# EAGLE board openmv-sdr (EAGLE 6.1)
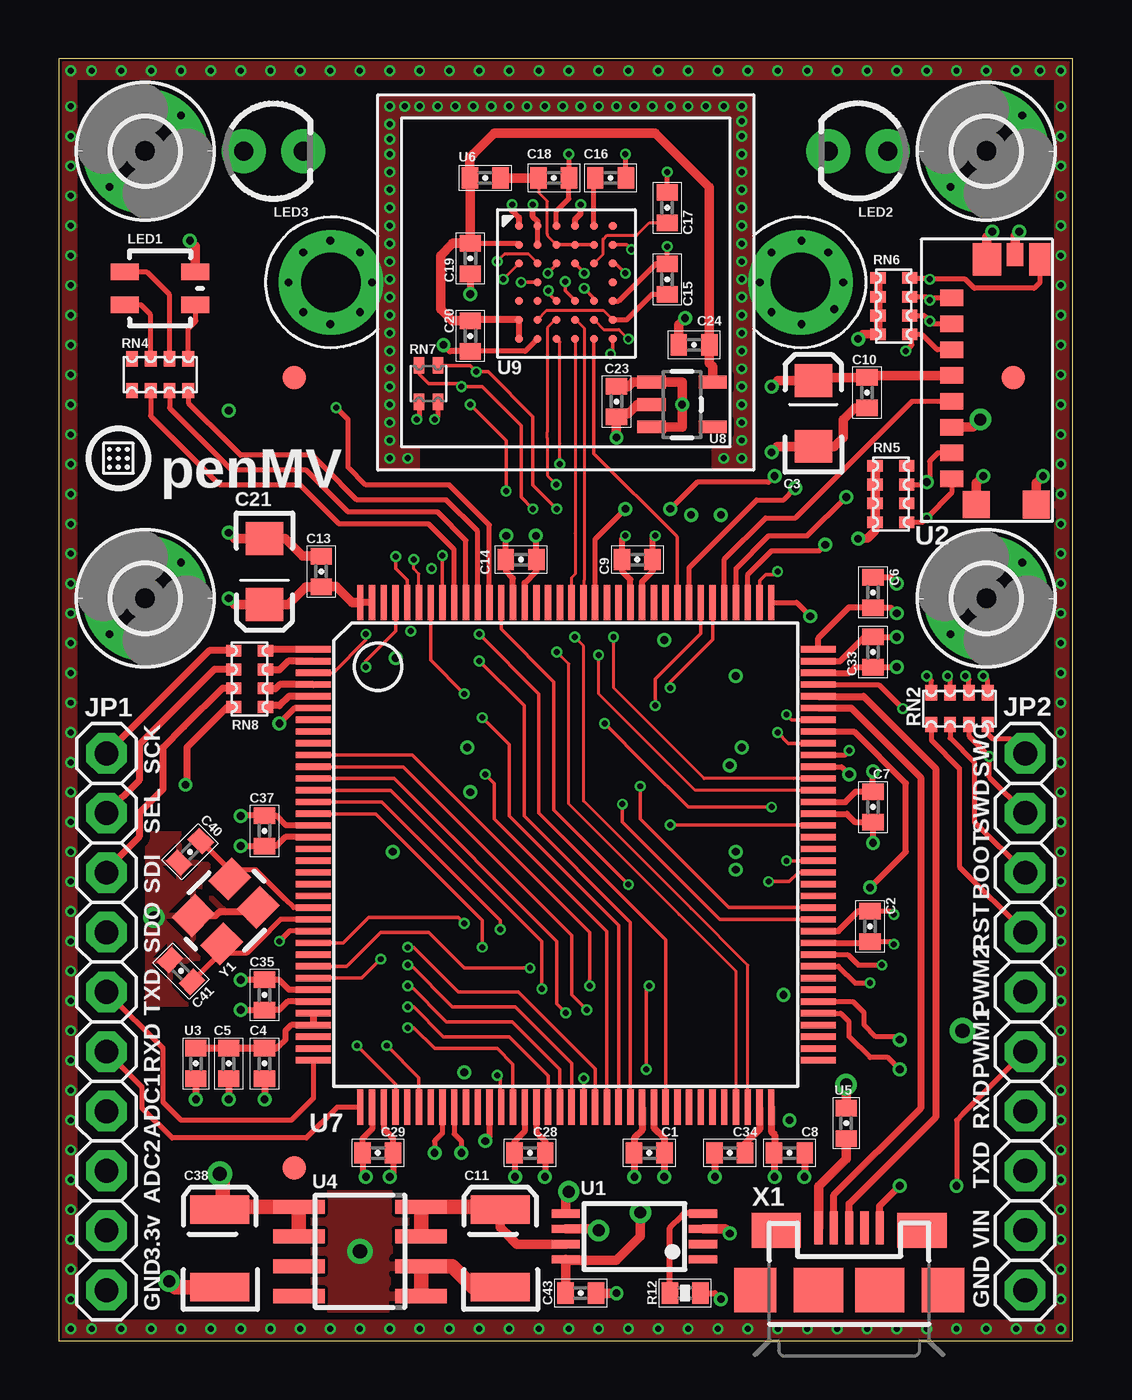
[diagram p0: board, top side]
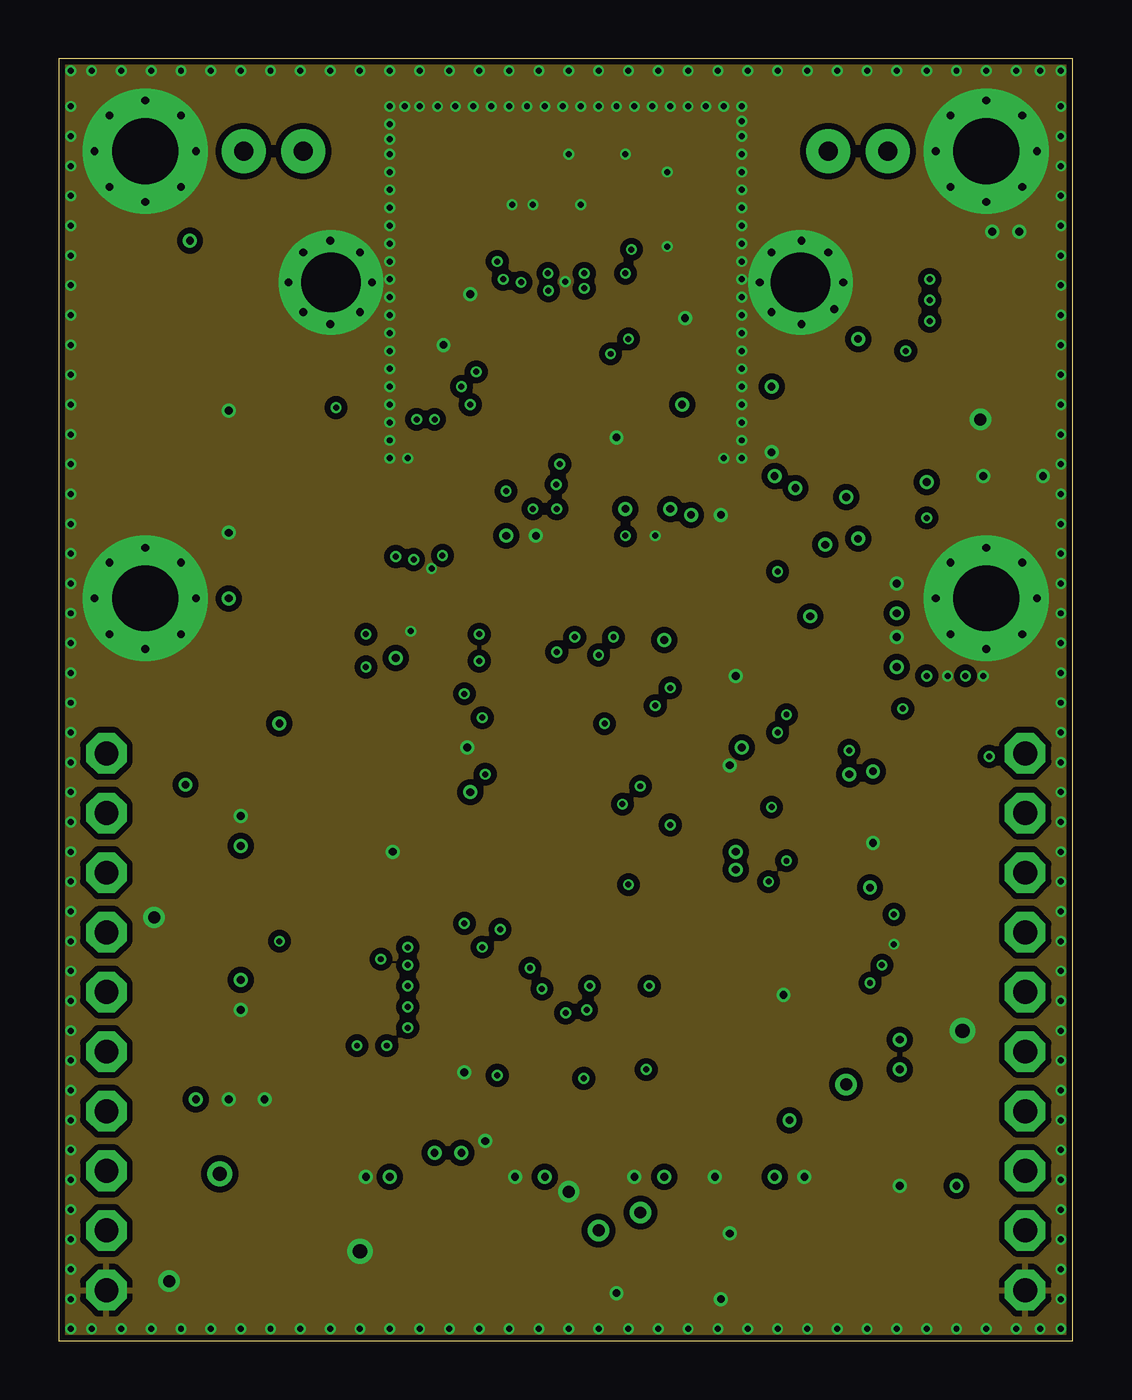
[diagram p1: board, inner layer GND]
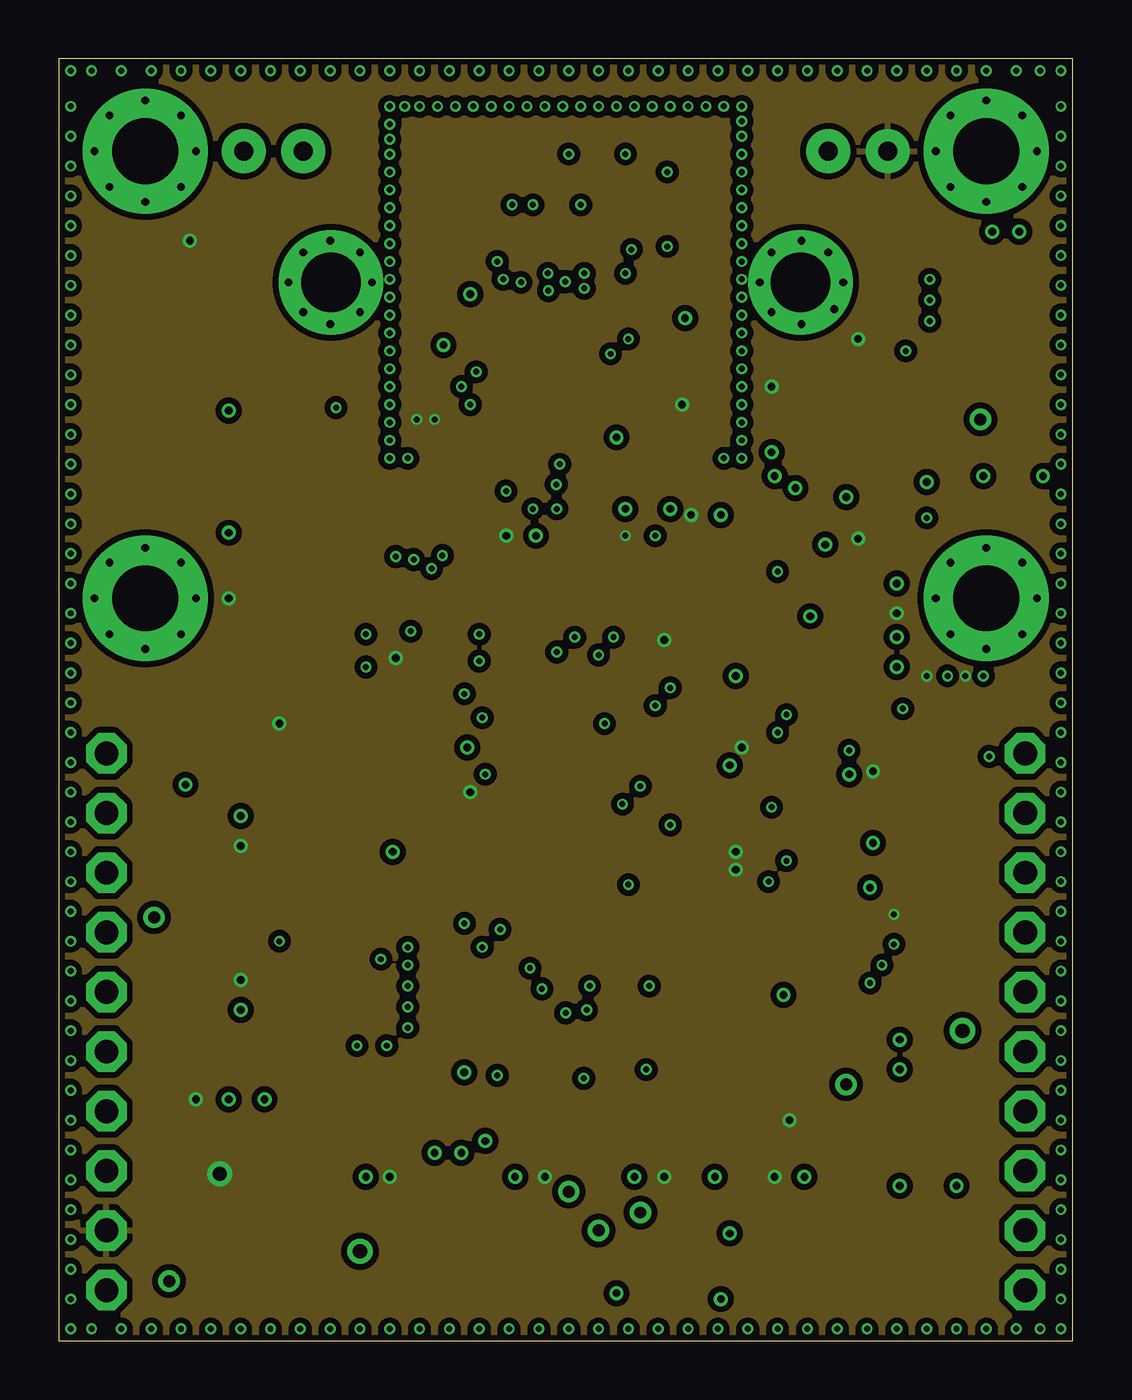
[diagram p2: board, inner layer VCC]
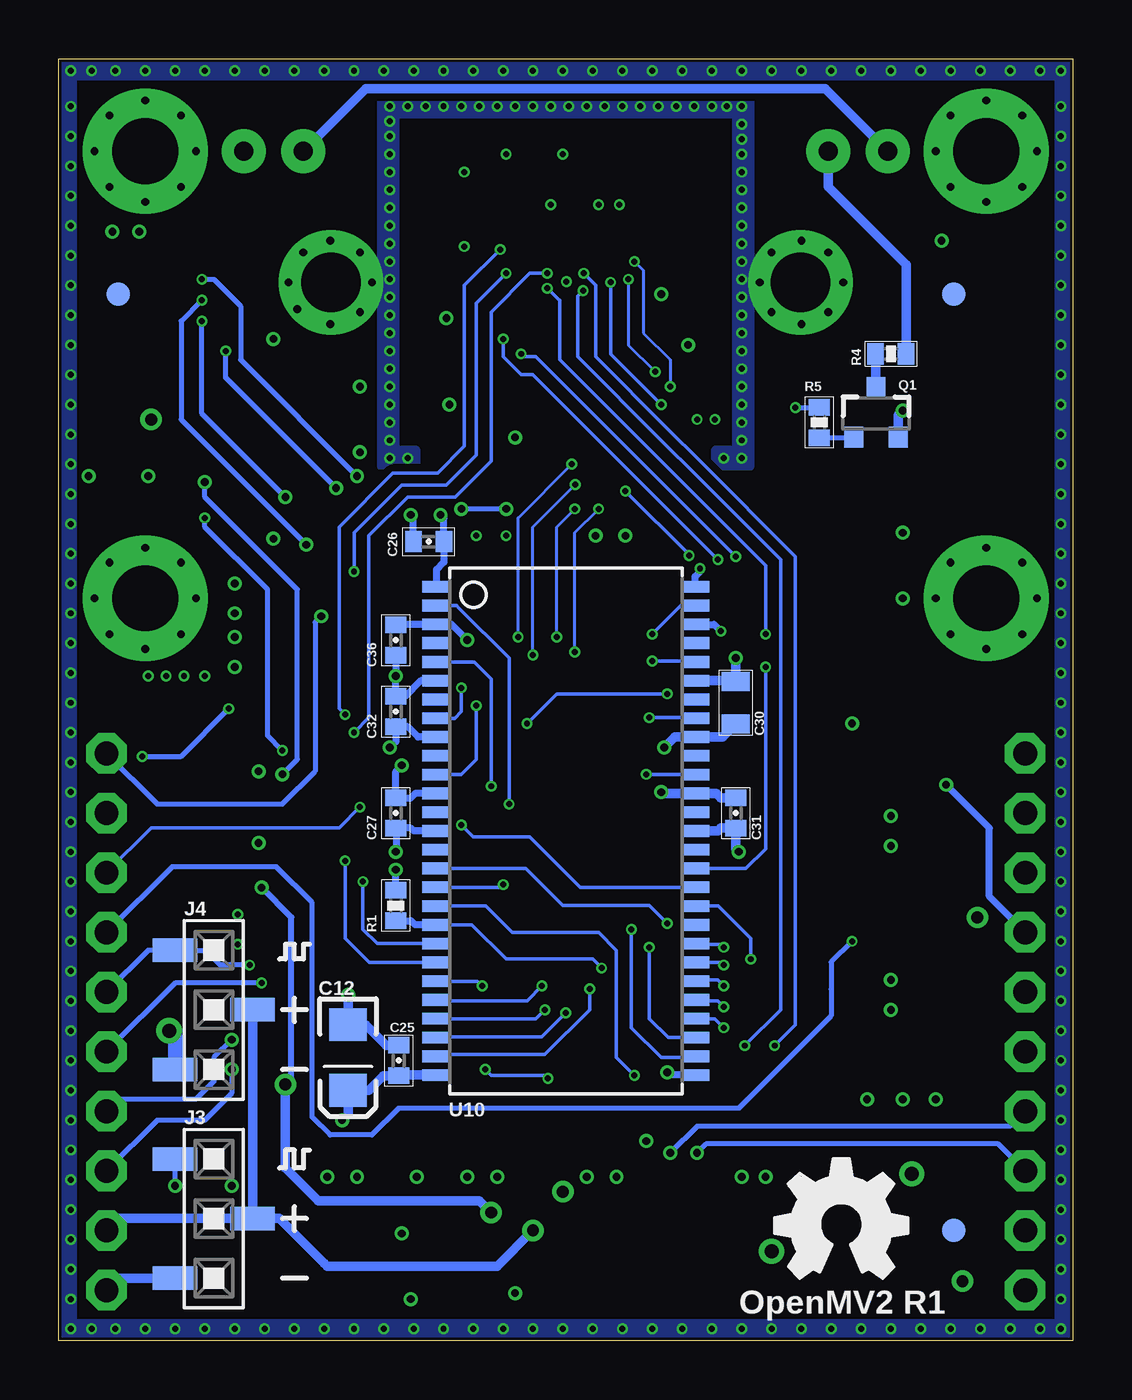
[diagram p3: board, bottom side, seen from below]

Size 43.18 x 54.61 mm. Coordinates in mm from the lower left corner, seen from the top.
Outline: 0,54.61 0,0 43.18,0 43.18,54.61 0,54.61
Copper layers (1*2+15*16): Top 0.035mm / dielectric 1.5mm / GND 0.035mm / dielectric 0.15mm / VCC 0.035mm / dielectric 0.2mm / Bottom 0.035mm
Design rules: minimum track width 5mil, minimum drill 10mil, track to track 6mil, track to pad 6mil, pad to pad 6mil, via to via 6mil, smd to smd 6mil, copper to edge 5mil, drill to drill 10mil, minimum pad ring 10mil, minimum via ring 4mil, stop-mask expansion 2mil, vias tented up to drill 30mil, thermal gap 10mil

## Footprints (pad centres in the part's own frame; a part is rotated, then mirrored left to right if it is on the bottom)
0402-CAP = smd 0.7 x 0.9: 1 -0.65,0; 2 0.65,0
EIA3216 = smd 1.4 x 1.6: A 1.4,0; C -1.4,0
EIA3528 = smd 1.2 x 2.5: A 1.65,0; C -1.65,0
0805 = smd 0.8 x 1.2: 1 -0.9,0; 2 0.9,0
2,8-PAD = drill 2.8 pad 5.334: B2,8 0,0
M1X3_SMD = smd 1 x 1.9: 1 -2.54,1.65; 2 0,-1.65; 3 2.54,1.65
1X10 = drill 1.016 octagon: 1 -11.43,0; 2 -8.89,0; 3 -6.35,0; 4 -3.81,0; 5 -1.27,0; 6 1.27,0; 7 3.81,0; 8 6.35,0; 9 8.89,0; 10 11.43,0
LED-TRICOLOR-SMD = smd 0.7 x 1.2: A 0.7,-1.5; B 0.7,1.5; G -0.7,1.5; R -0.7,-1.5
LED3MM = drill 0.813 pad 1.88: A -1.27,0; K 1.27,0
SOT23-3 = smd 0.8 x 0.9: 1 -0.95,-1; 2 0.95,-1; 3 0,1.1
0402-RES = smd 0.7 x 0.9: 1 -0.65,0; 2 0.65,0
CAT16 = smd 0.5 x 0.65: 1 -1.2,-0.675; 2 -0.4,-0.675; 3 0.4,-0.675; 4 1.2,-0.675; 5 1.2,0.675; 6 0.4,0.675; 7 -0.4,0.675; 8 -1.2,0.675
EXBV4V = smd 0.45 x 0.7: 1 -0.4,-0.775; 2 0.4,-0.775; 3 0.4,0.775; 4 -0.4,0.775
TSSOP8 = smd 1.2 x 0.35: 1 -2.925,0.975; 2 -2.925,0.325; 3 -2.925,-0.325; 4 -2.925,-0.975; 5 2.925,-0.975; 6 2.925,-0.325; 7 2.925,0.325; 8 2.925,0.975
USD-47571 = smd 1.15 x 1.15: G$1 -4.9,0.55 | smd 1.2 x 1.15: G$2 -4.9,-2 | smd 1.4 x 1.2: G$3 5.55,0.1 | smd 1 x 0.7: G$4 5.75,-1.1 | smd 1.4 x 0.9: G$5 5.55,-2.15 | smd 0.7 x 1: P$1 3.9,1.6; P$2 2.8,1.6; P$3 1.7,1.6; P$4 0.6,1.6; P$5 -0.5,1.6; P$6 -1.6,1.6; P$7 -2.7,1.6; P$8 -3.8,1.6
SOIC8 = smd 0.6 x 2.2: 1 -1.905,-2.6; 2 -0.635,-2.6; 3 0.635,-2.6; 4 1.905,-2.6; 5 1.905,2.6; 6 0.635,2.6; 7 -0.635,2.6; 8 -1.905,2.6
LQFP144 = smd 0.27 x 1.5: 1 -8.75,-10.75; 2 -8.25,-10.75; 3 -7.75,-10.75; 4 -7.25,-10.75; 5 -6.75,-10.75; 6 -6.25,-10.75; 7 -5.75,-10.75; 8 -5.25,-10.75; 9 -4.75,-10.75; 10 -4.25,-10.75; 11 -3.75,-10.75; 12 -3.25,-10.75; 13 -2.75,-10.75; 14 -2.25,-10.75; 15 -1.75,-10.75; 16 -1.25,-10.75; 17 -0.75,-10.75; 18 -0.25,-10.75; 19 0.25,-10.75; 20 0.75,-10.75; 21 1.25,-10.75; 22 1.75,-10.75; 23 2.25,-10.75; 24 2.75,-10.75; 25 3.25,-10.75; 26 3.75,-10.75; 27 4.25,-10.75; 28 4.75,-10.75; 29 5.25,-10.75; 30 5.75,-10.75; 31 6.25,-10.75; 32 6.75,-10.75; 33 7.25,-10.75; 34 7.75,-10.75; 35 8.25,-10.75; 36 8.75,-10.75; 73 8.75,10.75; 74 8.25,10.75; 75 7.75,10.75; 76 7.25,10.75; 77 6.75,10.75; 78 6.25,10.75; 79 5.75,10.75; 80 5.25,10.75; 81 4.75,10.75; 82 4.25,10.75; 83 3.75,10.75; 84 3.25,10.75; 85 2.75,10.75; 86 2.25,10.75; 87 1.75,10.75; 88 1.25,10.75; 89 0.75,10.75; 90 0.25,10.75; 91 -0.25,10.75; 92 -0.75,10.75; 93 -1.25,10.75; 94 -1.75,10.75; 95 -2.25,10.75; 96 -2.75,10.75; 97 -3.25,10.75; 98 -3.75,10.75; 99 -4.25,10.75; 100 -4.75,10.75; 101 -5.25,10.75; 102 -5.75,10.75; 103 -6.25,10.75; 104 -6.75,10.75; 105 -7.25,10.75; 106 -7.75,10.75; 107 -8.25,10.75; 108 -8.75,10.75 | smd 1.5 x 0.27: 37 10.75,-8.75; 38 10.75,-8.25; 39 10.75,-7.75; 40 10.75,-7.25; 41 10.75,-6.75; 42 10.75,-6.25; 43 10.75,-5.75; 44 10.75,-5.25; 45 10.75,-4.75; 46 10.75,-4.25; 47 10.75,-3.75; 48 10.75,-3.25; 49 10.75,-2.75; 50 10.75,-2.25; 51 10.75,-1.75; 52 10.75,-1.25; 53 10.75,-0.75; 54 10.75,-0.25; 55 10.75,0.25; 56 10.75,0.75; 57 10.75,1.25; 58 10.75,1.75; 59 10.75,2.25; 60 10.75,2.75; 61 10.75,3.25; 62 10.75,3.75; 63 10.75,4.25; 64 10.75,4.75; 65 10.75,5.25; 66 10.75,5.75; 67 10.75,6.25; 68 10.75,6.75; 69 10.75,7.25; 70 10.75,7.75; 71 10.75,8.25; 72 10.75,8.75; 109 -10.75,8.75; 110 -10.75,8.25; 111 -10.75,7.75; 112 -10.75,7.25; 113 -10.75,6.75; 114 -10.75,6.25; 115 -10.75,5.75; 116 -10.75,5.25; 117 -10.75,4.75; 118 -10.75,4.25; 119 -10.75,3.75; 120 -10.75,3.25; 121 -10.75,2.75; 122 -10.75,2.25; 123 -10.75,1.75; 124 -10.75,1.25; 125 -10.75,0.75; 126 -10.75,0.25; 127 -10.75,-0.25; 128 -10.75,-0.75; 129 -10.75,-1.25; 130 -10.75,-1.75; 131 -10.75,-2.25; 132 -10.75,-2.75; 133 -10.75,-3.25; 134 -10.75,-3.75; 135 -10.75,-4.25; 136 -10.75,-4.75; 137 -10.75,-5.25; 138 -10.75,-5.75; 139 -10.75,-6.25; 140 -10.75,-6.75; 141 -10.75,-7.25; 142 -10.75,-7.75; 143 -10.75,-8.25; 144 -10.75,-8.75
SOT23-5 = smd 0.55 x 1.2: 1 -0.95,-1.3; 2 0,-1.3; 3 0.95,-1.3; 4 0.95,1.3; 5 -0.95,1.3
CSP2 = smd 0.34 x 0.34: A1 -2,2.4; A2 -1.2,2.4; A3 -0.4,2.4; A4 0.4,2.4; A5 1.2,2.4; A6 2,2.4; B1 -2,1.6; B2 -1.2,1.6; B3 -0.4,1.6; B4 0.4,1.6; B5 1.2,1.6; B6 2,1.6; C1 -2,0.8; C2 -1.2,0.8; C3 -0.4,0.8; C4 0.4,0.8; C5 1.2,0.8; C6 2,0.8; D2 -1.2,0; D6 2,0; E1 -2,-0.8; E2 -1.2,-0.8; E3 -0.4,-0.8; E4 0.4,-0.8; E5 1.2,-0.8; E6 2,-0.8; F1 -2,-1.6; F2 -1.2,-1.6; F3 -0.4,-1.6; F4 0.4,-1.6; F5 1.2,-1.6; F6 2,-1.6; G1 -2,-2.4; G2 -1.2,-2.4; G3 -0.4,-2.4; G4 0.4,-2.4; G5 1.2,-2.4; G6 2,-2.4
TSOPII-54 = smd 0.5 x 1.2: 1 -10.4,-5.502; 2 -9.6,-5.502; 3 -8.8,-5.502; 4 -8,-5.502; 5 -7.2,-5.502; 6 -6.4,-5.502; 7 -5.6,-5.502; 8 -4.8,-5.502; 9 -4,-5.502; 10 -3.2,-5.502; 11 -2.4,-5.502; 12 -1.6,-5.502; 13 -0.8,-5.502; 14 0,-5.502; 15 0.8,-5.502; 16 1.6,-5.502; 17 2.4,-5.502; 18 3.2,-5.502; 19 4,-5.502; 20 4.8,-5.502; 21 5.6,-5.502; 22 6.4,-5.502; 23 7.2,-5.502; 24 8,-5.502; 25 8.8,-5.502; 26 9.6,-5.502; 27 10.4,-5.502; 28 10.4,5.502; 29 9.6,5.502; 30 8.8,5.502; 31 8,5.502; 32 7.2,5.502; 33 6.4,5.502; 34 5.6,5.502; 35 4.8,5.502; 36 4,5.502; 37 3.2,5.502; 38 2.4,5.502; 39 1.6,5.502; 40 0.8,5.502; 41 0,5.502; 42 -0.8,5.502; 43 -1.6,5.502; 44 -2.4,5.502; 45 -3.2,5.502; 46 -4,5.502; 47 -4.8,5.502; 48 -5.6,5.502; 49 -6.4,5.502; 50 -7.2,5.502; 51 -8,5.502; 52 -8.8,5.502; 53 -9.6,5.502; 54 -10.4,5.502
LENSMOUNT = drill 2.54 pad 4.445: P$1 -10,0; P$2 10,0
FIDUCIAL_1MM = smd 1 x 1: 1 0,0
USB-MICROB = smd 0.35 x 1.4: D+ 0,2.65; D- -0.65,2.65; GND 1.3,2.65; ID 0.65,2.65; VBUS -1.3,2.65 | smd 1.8 x 1.9: MT1 -4,0; MT2 4,0 | smd 2.1 x 1.5: MT3 3.1,2.55; MT4 -3.1,2.55 | smd 2.1 x 1.9: MT5 -1.3,0; MT6 1.3,0
CRYSTAL3.2X2.5 = smd 1.4 x 1.2: 1 -1.1,-0.85; 2 1.1,-0.85; 3 1.1,0.85; 4 -1.1,0.85

## Placement (x,y rotation side)
C1  0.1uF  [0402-CAP]  25.15,8 180 top
C2  0.1uF  [0402-CAP]  34.54,17.65 270 top
C3  47uF  [EIA3216]  32.13,39.5 90 top
C4  1uF  [0402-CAP]  8.76,11.81 270 top
C5  0.1uF  [0402-CAP]  7.24,11.81 270 top
C6  0.1uF  [0402-CAP]  34.67,31.88 90 top
C7  0.1uF  [0402-CAP]  34.67,22.73 270 top
C8  0.1uF  [0402-CAP]  31.11,8 0 top
C9  0.1uF  [0402-CAP]  24.64,33.27 0 top
C10  0.1uF  [0402-CAP]  34.42,40.39 270 top
C11  100uF  [EIA3528]  18.8,3.94 90 top
C12  100uF  [EIA3216]  30.86,12.06 270 bottom
C13  0.1uF  [0402-CAP]  11.18,32.77 90 top
C14  0.1uF  [0402-CAP]  19.68,33.27 0 top
C15  4.7uF  [0402-CAP]  25.91,45.21 90 top
C16  0.1uF  [0402-CAP]  23.5,49.53 0 top
C17  0.1uF  [0402-CAP]  25.91,48.26 90 top
C18  0.1uF  [0402-CAP]  21.08,49.53 0 top
C19  4.7uF  [0402-CAP]  17.53,46.1 270 top
C20  0.1uF  [0402-CAP]  17.53,42.8 270 top
C21  100uF  [EIA3216]  8.76,32.77 270 top
C23  10uF  [0402-CAP]  23.75,40.01 270 top
C24  10uF  [0402-CAP]  27.05,42.42 180 top
C25  0.1uF  [0402-CAP]  28.7,11.94 90 bottom
C26  0.1uF  [0402-CAP]  27.43,34.04 180 bottom
C27  0.1uF  [0402-CAP]  28.83,22.48 90 bottom
C28  0.1uF  [0402-CAP]  20.07,8 0 top
C29  0.1uF  [0402-CAP]  13.59,8 180 top
C30  10uF  [0805]  14.35,27.18 270 bottom
C31  0.1uF  [0402-CAP]  14.35,22.48 270 bottom
C32  0.1uF  [0402-CAP]  28.83,26.8 90 bottom
C33  2.2uF  [0402-CAP]  34.67,29.34 90 top
C34  2.2uF  [0402-CAP]  28.57,8 180 top
C35  0.1uF  [0402-CAP]  8.76,14.73 270 top
C36  0.1uF  [0402-CAP]  28.83,29.84 270 bottom
C37  0.1uF  [0402-CAP]  8.76,21.72 90 top
C38  100uF  [EIA3528]  6.86,3.94 90 top
C40  18pF  [0402-CAP]  5.59,20.83 45 top
C41  18pF  [0402-CAP]  5.21,15.75 315 top
C43  0.1uF  [0402-CAP]  22.23,2.03 0 top
H1  MOUNT-PAD-ROUND2.8  [2,8-PAD]  39.5,31.62 90 top
H2  MOUNT-PAD-ROUND2.8  [2,8-PAD]  39.5,50.67 90 top
H6  MOUNT-PAD-ROUND2.8  [2,8-PAD]  3.68,50.67 270 top
H8  MOUNT-PAD-ROUND2.8  [2,8-PAD]  3.68,31.62 270 top
J3  CON_HEADER_1X03  [M1X3_SMD]  36.58,5.21 90 bottom
J4  CON_HEADER_1X03  [M1X3_SMD]  36.58,14.1 90 bottom
JP1  [1X10]  2.03,13.59 270 top
JP2  [1X10]  41.15,13.59 270 top
LED1  LED-TRICOLOR  [LED-TRICOLOR-SMD]  4.32,44.83 90 top
LED2  [LED3MM]  34.04,50.67 180 top
LED3  [LED3MM]  9.14,50.67 0 top
LOGO1  OSHW_LOGO_FILLX0200-NT  [OSHW_FILLX200_NOTEXT]  12.7,2.67 0 bottom
Q1  MOSFET  [SOT23-3]  8.38,39.5 0 bottom
R1  10K  [0402-RES]  28.83,18.54 270 bottom
R4  10ohm  [0402-RES]  7.75,42.04 180 bottom
R5  10k  [0402-RES]  10.79,39.12 270 bottom
R12  1K  [0402-RES]  26.67,2.03 180 top
RN2  [CAT16]  38.35,26.92 180 top
RN4  [CAT16]  4.32,41.15 180 top
RN5  [CAT16]  35.43,36.07 270 top
RN6  [CAT16]  35.56,44.07 270 top
RN7  [EXBV4V]  15.75,40.77 180 top
RN8  [CAT16]  8.13,28.19 270 top
U1  TPS2114APW  [TSSOP8]  24.51,4.45 180 top
U2  USD-47571  [USD-47571]  39.62,40.51 90 top
U3  BEAD  [0402-CAP]  5.84,11.81 270 top
U4  TPS768  [SOIC8]  12.83,3.81 90 top
U5  BEAD  [0402-CAP]  33.53,9.27 90 top
U6  BEAD  [0402-CAP]  18.16,49.53 180 top
U7  STM32F429  [LQFP144]  21.59,20.7 270 top
U8  VREG_25  [SOT23-5]  26.54,39.88 270 top
U9  OV2640  [CSP2]  21.59,45.09 0 top
U10  IS42S81600E-7TL  [TSOPII-54]  21.59,21.72 270 bottom
U$1  LENSMOUNT  [LENSMOUNT]  21.59,45.09 0 top
U$14  FIDUCIAL  [FIDUCIAL_1MM]  10.03,41.02 0 top
U$15  FIDUCIAL  [FIDUCIAL_1MM]  40.64,44.58 270 bottom
U$16  FIDUCIAL  [FIDUCIAL_1MM]  5.08,44.58 0 bottom
U$17  FIDUCIAL  [FIDUCIAL_1MM]  40.64,41.02 90 top
U$19  FIDUCIAL  [FIDUCIAL_1MM]  5.08,4.7 0 bottom
U$20  FIDUCIAL  [FIDUCIAL_1MM]  10.03,7.37 0 top
X1  USB-MICROB  [USB-MICROB]  33.66,2.16 0 top
Y1  [CRYSTAL3.2X2.5]  7.11,18.29 45 top

## Library data of the parts
C1-C21 C23-C38 C40 C41 C43 LED1-LED3 Q1 R1 R5 R12 U8 X1 = sfe
H1 H2 H6 H8 = holes
J3 J4 = dp_devices
JP1 JP2 = pinhead
LOGO1 R4 = iofault
RN2 RN4-RN8 = resistor-dil; OC_FARNELL: unknown; OC_NEWARK: unknown
U1 U2 U4 U10 Y1 = mux
U3 U5 U6 = heka
U7 = stm32
U9 U$1 = omnivision
U$14-U$17 U$19 U$20 = adafruit

## Nets
2.8V: C19.1 C20.1 C24.1 U6.2 U8.5 U9.B1 U9.F1 U9.G1
ADC12_IN5: U7.41
ADC12_IN14: JP1.8 U7.44
ADC12_IN15: JP1.7 U7.45
BOOT0: JP2.3 RN2.6 U7.138
DCMI_CLK: U7.100 U9.C4
DCMI_D0: U7.96 U9.F3
DCMI_D1: U7.97 U9.G3
DCMI_D2: U7.125 U9.F4
DCMI_D3: U7.126 U9.G4
DCMI_D4: U7.3 U9.E5
DCMI_D5: U7.117 U9.G5
DCMI_D6: U7.139 U9.F5
DCMI_D7: U7.140 U9.G6
DCMI_HSYNC: U7.40 U9.C3
DCMI_PCLK: U7.42 U9.E3
DCMI_PWDN: U7.102 U9.B6
DCMI_RST: U7.110 U9.C6
DCMI_SCL: RN7.2 U7.69 U9.C2
DCMI_SDA: RN7.1 U7.70 U9.C1
DCMI_VSYNC: U7.137 U9.D2
DRAM_A0: U7.10 U10.23
DRAM_A1: U7.11 U10.24
DRAM_A2: U7.12 U10.25
DRAM_A3: U7.13 U10.26
DRAM_A4: U7.14 U10.29
DRAM_A5: U7.15 U10.30
DRAM_A6: U7.50 U10.31
DRAM_A7: U7.53 U10.32
DRAM_A8: U7.54 U10.33
DRAM_A9: U7.55 U10.34
DRAM_A10: U7.56 U10.22
DRAM_A11: U7.57 U10.35
DRAM_BA0: U7.89 U10.20
DRAM_BA1: U7.90 U10.21
DRAM_CAS: U7.132 U10.17
DRAM_CLK: U7.93 U10.38
DRAM_CLKE: U7.29 U10.37
DRAM_CS: R1.2 U7.28 U10.19
DRAM_D0: U7.85 U10.2
DRAM_D1: U7.86 U10.5
DRAM_D2: U7.114 U10.8
DRAM_D3: U7.115 U10.11
DRAM_D4: U7.58 U10.44
DRAM_D5: U7.59 U10.47
DRAM_D6: U7.60 U10.50
DRAM_D7: U7.63 U10.53
DRAM_DQM: U7.141 U10.39
DRAM_RAS: U7.49 U10.18
DRAM_WE: U7.26 U10.16
FS_DN: U7.103 X1.D-
FS_DP: U7.104 X1.D+
GND: C1.2 C2.2 C3.C C4.2 C5.2 C6.2 C7.2 C8.2 C9.2 C10.2 C11.C C12.C C13.2 C14.2 C15.2 C16.2 C17.2 C18.2 C19.2 C20.2 C21.C C23.2 C24.2 C25.2 C26.2 C27.2 C28.1 C29.2 C30.2 C31.2 C32.2 C33.2 C34.2 C35.2 C36.2 C37.2 C38.C C40.1 C41.1 C43.2 H1.B2,8 H2.B2,8 H6.B2,8 H8.B2,8 J3.1 J4.1 JP1.10 JP2.10 Q1.2 R12.1 RN2.1 RN2.3 U1.3 U1.5 U2.G$1 U2.G$2 U2.G$3 U2.G$4 U2.P$6 U4.1 U4.2 U7.16 U7.31 U7.38 U7.48 U7.51 U7.61 U7.83 U7.94 U7.107 U7.120 U7.130 U8.2 U9.A1 U9.A2 U9.A3 U9.A4 U9.B2 U9.E4 U9.E6 U9.G2 U10.6 U10.12 U10.28 U10.41 U10.46 U10.52 U10.54 U$1.P$1 U$1.P$2 X1.GND Y1.2 Y1.4
LED_B: RN4.7 U7.135
LED_G: RN4.6 U7.136
LED_IR: R5.1 U7.133
LED_R: RN4.8 U7.134
N$1: C17.1 U9.C5
N$2: C40.2 U7.23 Y1.3
N$3: C16.1 U9.A5
N$4: C41.2 U7.24 Y1.1
N$5: Q1.1 R5.2
N$6: C15.1 U9.F2 U9.F6
N$7: C4.1 C5.1 U3.1 U7.32 U7.33
N$8: LED1.R RN4.1
N$9: LED1.G RN4.3
N$10: LED3.K R4.1
N$11: LED1.B RN4.2
N$12: U7.127
N$13: C18.1 U6.1 U9.B3 U9.B4 U9.B5
N$14: Q1.3 R4.2
N$15: U7.128
N$16: LED2.K LED3.A
N$17: U7.92
N$18: U7.18
N$19: U7.91
N$20: JP1.1 RN8.1
N$21: JP1.2 RN8.2
N$22: U5.1 X1.VBUS
N$23: JP1.3 RN8.3
N$24: JP1.4 RN8.4
N$25: U7.122
N$26: R12.2 U1.4
N$27: U7.19
N$28: U7.20
NRST: JP2.4 RN2.5 U7.25
SD_CD: RN6.8 U2.G$5 U7.124
SDIO_CLK: U2.P$5 U7.113
SDIO_CMD: RN6.5 U2.P$3 U7.116
SDIO_D0: RN5.7 U2.P$7 U7.98
SDIO_D1: RN5.5 U2.P$8 U7.99
SDIO_D2: RN6.7 U2.P$1 U7.111
SDIO_D3: RN6.6 U2.P$2 U7.112
SPI4_MISO: RN8.6 U7.4
SPI4_MOSI: RN8.5 U7.5
SPI4_NSS: RN8.7 U7.2
SPI4_SCK: RN8.8 U7.1
SWCLK: JP2.1 RN2.8 U7.109
SWDIO: JP2.2 RN2.7 U7.105
TIM4_CH1: J3.3 JP2.6 U7.81
TIM4_CH2: J4.3 JP2.5 U7.82
TIM12_CH1: U7.75
TIM12_CH2: U7.76
USART2_RX: JP1.6 U7.37
USART2_TX: JP1.5 U7.36
USART3_RX: JP2.7 U7.78
USART3_TX: JP2.8 U7.77
VBAT: J3.2 J4.2 JP2.9 U1.6
VBUS: C43.1 U1.8 U5.2 U7.101
VCAP1: C34.1 U7.71
VCAP2: C33.1 U7.106
VCC: C1.1 C2.1 C3.A C6.1 C7.1 C8.1 C9.1 C10.1 C12.A C13.1 C14.1 C21.A C23.1 C25.1 C26.1 C27.1 C28.2 C29.1 C30.1 C31.1 C32.1 C35.1 C36.1 C37.1 C38.A JP1.9 LED1.A LED2.A R1.1 RN2.2 RN2.4 RN5.1 RN5.2 RN5.3 RN5.4 RN6.1 RN6.2 RN6.3 RN6.4 RN7.3 RN7.4 U2.P$4 U3.2 U4.5 U4.6 U7.6 U7.17 U7.30 U7.39 U7.52 U7.62 U7.72 U7.84 U7.95 U7.108 U7.121 U7.131 U7.143 U7.144 U8.1 U8.3 U10.1 U10.3 U10.9 U10.14 U10.27 U10.43 U10.49
VIN: C11.A U1.7 U4.3 U4.4

## Tracks (layer width: path | path; a pad name or v marks a point on that pad's centre or on a via)
2.8V
  Top 0.203: C19.1 19.52,46.75 U9.B1
  Top 0.254: U9.F1 U9.G1
  Top 0.305: U9.F1 17.56,43.48 C20.1
  Top 0.406: C20.1 16.75,43.45 16.26,43.94 16.26,46.23 16.76,46.74 16.78,46.75 C19.1 17.53,48.01 17.53,49.52 U6.2 17.51,50.4 17.53,50.42 17.65,50.55 18.54,51.44 25.4,51.44 27.7,49.13 27.7,47.1 C24.1 27.7,41.64 27.81,41.53 27.84,41.5 U8.5
ADC12_IN14  (via drill 0.33)
  Top 0.203: U7.44 16.34,8.85 16,8.51 v16,8
  Bottom 0.203: JP1.8 3.05,8.26 3.17,8.38 15.62,8.38 v16,8
ADC12_IN15  (via drill 0.33)
  Top 0.203: U7.45 16.84,8.81 17.14,8.51 v17.14,8
  Bottom 0.203: JP1.7 2.67,9.14 16,9.14 v17.14,8
BOOT0  (via drill 0.25)
  Top 0.152: U7.138 15.84,28.99 v17.27,27.56 | v23.24,26.29 25.02,24.51 26.73,22.8 26.8,22.73 v30.35,22.73
  Top 0.203: RN2.6 37.95,25.67 38.99,24.64 38.99,22.1 JP2.3
  Bottom 0.152: v17.27,27.56 21.97,27.56 v23.24,26.29 | v30.35,22.73 31.24,21.84 39.24,21.84 JP2.3
DCMI_CLK  (via drill 0.25)
  Top 0.152: U7.100 31.06,25.45 v30.61,25.91 | v22.38,45.47 22.38,45.5 U9.C4
  Bottom 0.152: v22.38,45.47 23.11,45.47 24.77,43.81 24.77,37.47 26.29,35.94 28.32,35.94 29.97,34.29 29.97,26.54 v30.61,25.91
DCMI_D0  (via drill 0.25)
  Top 0.127: 21.13,43.48 20.8,43.16 20.8,38.71 20.8,38.46 20.8,36.85 v21.18,36.47 | U7.96 31.03,23.45 27.09,23.45 22.99,27.56 v22.99,29.21
  Top 0.152: U9.F3 21.13,43.48
  Bottom 0.127: v22.99,29.21 22.99,34.67 v21.18,36.47
DCMI_D1  (via drill 0.25)
  Top 0.127: U7.97 31.29,23.95 27.48,23.95 23.62,27.81 v23.62,29.97 | v21.34,37.34 21.34,38.23 21.34,42.54 U9.G3
  Top 0.152: 21.21,42.67 U9.G3
  Bottom 0.127: v23.62,29.97 23.62,35.05 v21.34,37.34
DCMI_D2
  Top 0.127: U9.F4 22.02,43.48 22.38,43.13 22.38,40.82 22.38,32.41 22.38,31.49
  Top 0.152: 22.38,31.49 U7.125
DCMI_D3
  Top 0.127: U9.G4 21.99,34.4 21.99,32.66 21.84,32.51 U7.126
DCMI_D4  (via drill 0.25)
  Top 0.152: U7.3 11.69,28.45 13.08,29.84 v13.08,30.1 | U9.E5 22.79,44.42 v22.38,44.83
  Bottom 0.152: v13.08,30.1 13.08,33.02 16.26,36.2 17.91,37.85 21.84,41.78 21.84,44.32 21.87,44.32 v22.38,44.83
DCMI_D5
  Top 0.152: U9.G5 22.79,41.73 22.79,41.09 22.79,38.86 22.79,37.92 22.79,37.79 26.29,34.29 26.34,34.24 U7.117
DCMI_D6  (via drill 0.25)
  Top 0.127: U9.F5 22.81,43.48 23.22,43.08 23.85,43.08 24.13,42.8 | U7.139 15.34,32.67 15.11,32.89 v15.11,33.27
  Top 0.152: 24.13,42.8 v24.26,42.67
  Bottom 0.152: v15.11,33.27 16.76,34.92 22.99,41.15 23.5,41.15 24.26,41.91 v24.26,42.67
DCMI_D7  (via drill 0.25)
  Top 0.152: U9.G6 23.59,42.13 v23.5,42.04 | U7.140 14.84,32.4 14.35,32.89 v14.35,33.4
  Bottom 0.152: v14.35,33.4 16.51,35.56 17.65,36.7 22.86,41.91 23.37,41.91 v23.5,42.04
DCMI_HSYNC  (via drill 0.25)
  Top 0.152: U7.40 14.34,10.93 v12.7,12.57 | U9.C3 21.19,45.83 v20.83,45.47
  Bottom 0.152: v12.7,12.57 11.81,13.46 11.81,33.4 15.88,37.47 17.27,38.86 20.32,41.91 20.32,44.96 v20.83,45.47
DCMI_PCLK  (via drill 0.25)
  Top 0.152: U7.42 15.34,11.2 v13.97,12.57 | v20.85,44.73 20.85,44.62 U9.E3
  Bottom 0.152: v13.97,12.57 12.45,14.1 12.45,33.15 12.45,33.27 16,36.83 17.53,38.35 21.08,41.91 21.08,44.5 v20.85,44.73
DCMI_PWDN  (via drill 0.25)
  Top 0.152: U7.102 31.21,26.45 v30.99,26.67 | U9.B6 24.18,46.69 v24.38,46.48
  Bottom 0.152: v30.99,26.67 31.24,26.92 31.24,34.67 28.96,36.96 27.05,36.96 25.91,38.1 25.91,44.96 v24.38,46.48
DCMI_RST  (via drill 0.25)
  Top 0.152: U7.110 29.84,32.38 30.1,32.64 30.48,32.64 v30.61,32.77 | U9.C6 23.71,45.88 v24.13,45.47
  Bottom 0.152: v30.61,32.77 30.61,34.42 28.57,36.45 26.67,36.45 25.4,37.72 25.4,44.2 24.38,45.21 v24.13,45.47
DCMI_SCL  (via drill 0.25)
  Top 0.127: U7.69 28.84,15.74 26.42,18.16 21.72,22.86 21.72,28.83 v21.21,29.34 | 20.36,45.94 20.02,46.28 19.1,46.28 18.97,46.28 v18.67,45.97
  Top 0.152: U9.C2 20.36,45.88 20.36,45.94 | RN7.2 15.35,41.17 15.75,40.77 17.02,40.77 v17.14,40.64 18.03,40.64 19.68,38.99 19.68,35.94 v20.19,35.43
  Bottom 0.127: v18.67,45.97 18.29,45.59 18.29,43.43 18.29,42.93 17.14,41.78 v17.14,40.64 | v21.21,29.34 21.21,34.42 v20.19,35.43
DCMI_SDA  (via drill 0.25)
  Top 0.127: U7.70 29.34,16 26.92,18.41 22.35,22.99 22.35,29.59 v21.97,29.97 | U9.C1 v18.92,45.21
  Top 0.152: U9.C1 | v21.21,35.43 20.19,36.45 20.19,39.37 18.29,41.27 v17.78,41.27 17.51,41.54 RN7.1
  Bottom 0.127: v18.92,45.21 18.92,42.42 v17.78,41.27 | v21.97,29.97 21.97,34.67 v21.21,35.43
DCMI_VSYNC  (via drill 0.25)
  Top 0.152: v19.68,45.09 U9.D2 | U7.137 v16.34,33.44 | v19.05,36.2 19.05,38.35 v17.53,39.88
  Bottom 0.152: v19.68,45.09 19.68,42.29 19.68,42.04 v17.53,39.88 | v16.34,33.44 16.34,33.48 v19.05,36.2
DRAM_A0  (via drill 0.25)
  Top 0.152: U7.10 15.05,24.95 22.61,17.4 v22.61,15.11
  Bottom 0.152: v22.61,15.11 23.24,14.48 27.05,14.48 U10.23
DRAM_A1  (via drill 0.25)
  Top 0.152: U7.11 14.66,24.45 21.84,17.27 21.84,14.73 v22.48,14.1
  Bottom 0.152: v22.48,14.1 22.86,13.72 U10.24
DRAM_A2  (via drill 0.25)
  Top 0.152: U7.12 14.28,23.95 21.21,17.02 21.21,14.35 v21.59,13.97
  Bottom 0.152: v21.59,13.97 22.61,12.95 27.05,12.95 U10.25
DRAM_A3  (via drill 0.25)
  Top 0.152: U7.13 14.14,23.45 20.57,17.02 v20.57,14.99
  Bottom 0.152: v20.57,14.99 20.57,14.1 22.48,12.19 27.02,12.19 U10.26
DRAM_A4  (via drill 0.25)
  Top 0.152: U7.14 13.75,22.95 18.67,18.03 18.8,17.91 v18.8,17.53
  Bottom 0.152: v18.8,17.53 18.8,16.64 18.8,16 18.8,13.34 17.53,12.06 16.14,12.06 U10.29
DRAM_A5  (via drill 0.25)
  Top 0.152: U7.15 13.49,22.45 17.91,18.03 18.03,17.91 v18.03,16.76
  Bottom 0.152: U10.30 17.23,12.92 18.03,13.72 v18.03,16.76
DRAM_A6  (via drill 0.25)
  Top 0.152: U7.50 19.34,11.27 19.34,11.78 18.67,12.45 16,12.45 15.11,13.34 v14.86,13.34
  Bottom 0.152: U10.31 15.24,13.72 v14.86,13.34
DRAM_A7  (via drill 0.25)
  Top 0.152: U7.53 20.84,10.78 20.84,11.29 19.18,12.95 16.38,12.95 15.11,14.22 v14.86,14.22
  Bottom 0.152: 16.13,14.48 U10.32 16.05,14.48 15.11,14.48 v14.86,14.22
DRAM_A8  (via drill 0.25)
  Top 0.152: U7.54 21.34,11.17 21.34,11.55 19.3,13.59 16.51,13.59 14.99,15.11 v14.86,15.11
  Bottom 0.152: 16.16,15.24 U10.33 16.04,15.37 15.11,15.37 v14.86,15.11
DRAM_A9  (via drill 0.25)
  Top 0.152: U7.55 21.84,11.56 21.84,11.81 19.43,14.22 16.76,14.22 14.99,16 v14.86,16
  Bottom 0.152: U10.34 14.97,16.12 v14.86,16
DRAM_A10  (via drill 0.25)
  Top 0.152: v22.35,11.18 22.35,9.96 U7.56 | v25.02,11.56 25.02,14.99 v25.15,15.11
  Bottom 0.152: v22.35,11.18 22.48,11.3 24.77,11.3 v25.02,11.56 | U10.22 25.35,15.32 v25.15,15.11
DRAM_A11  (via drill 0.25)
  Top 0.152: U7.57 22.84,11.58 19.56,14.86 17.02,14.86 15.24,16.64 15.11,16.76 v14.86,16.76
  Bottom 0.152: 16.11,16.89 U10.35 16.06,16.89 14.99,16.89 v14.86,16.76
DRAM_BA0  (via drill 0.25)
  Top 0.152: U7.89 31.51,19.95 31.11,19.56 v30.23,19.56
  Bottom 0.152: U10.20 27.84,16.92 29.62,16.92 30.23,17.53 v30.23,19.56
DRAM_BA1  (via drill 0.25)
  Top 0.152: v30.99,20.45 U7.90
  Top 0.203: U7.90
  Bottom 0.152: U10.21 29.96,16.12 30.99,17.14 v30.99,20.45
DRAM_CAS  (via drill 0.25)
  Top 0.152: U7.132 18.84,30.31 21.08,28.07 21.08,22.61 v24.26,19.43
  Bottom 0.152: U10.17 25.67,19.32 24.37,19.32 v24.26,19.43
DRAM_CLK  (via drill 0.25)
  Top 0.152: U7.93 32.32,21.97 31.37,21.97 31.24,21.97 v26.04,21.97
  Bottom 0.152: U10.38 20.97,19.32 23.11,21.46 25.53,21.46 v26.04,21.97
DRAM_CLKE  (via drill 0.25)
  Top 0.152: U7.29 12.91,15.45 v13.72,16.26
  Bottom 0.152: 16.06,18.54 U10.37 15.09,18.52 13.72,17.14 v13.72,16.26
DRAM_CS  (via drill 0.25)
  Top 0.152: v20.07,15.88 17.27,15.88 15.75,17.4 13.72,17.4 12.32,16 12.27,15.95 U7.28
  Bottom 0.152: v20.07,15.88 20.45,16.26 24.13,16.26 25.59,17.72 U10.19
  Bottom 0.305: U10.19 28,17.72 28.07,17.78 28.18,17.89 R1.2
DRAM_D0  (via drill 0.25)
  Top 0.152: U7.85 28.15,17.95 24,22.1 v24,22.86
  Bottom 0.152: U10.2 26.24,31.32 26.16,31.24 24,29.08 v24,22.86
DRAM_D1  (via drill 0.25)
  Top 0.152: U7.86 28.54,18.45 24.77,22.23 v24.77,23.62
  Bottom 0.152: U10.5 25.49,28.92 24.89,28.32 24.77,28.19 v24.77,23.62
DRAM_D2  (via drill 0.25)
  Top 0.152: U7.114 27.84,29.87 26.04,28.07 v26.04,27.81
  Bottom 0.152: U10.8 26.32,26.52 26.04,26.8 v26.04,27.81
DRAM_D3  (via drill 0.25)
  Top 0.152: U7.115 27.34,30.13 25.4,28.19 v25.4,27.05
  Bottom 0.152: U10.11 26.05,24.12 25.4,24.77 v25.4,27.05
DRAM_D4  (via drill 0.25)
  Top 0.152: U7.58 23.34,17.43 18.54,22.23 18.54,23.75 v18.16,24.13
  Bottom 0.152: v18.16,24.13 U10.44
DRAM_D5  (via drill 0.25)
  Top 0.152: U7.59 23.84,17.69 19.18,22.35 19.18,25.4 18.16,26.42 v18.03,26.54
  Bottom 0.152: U10.47 16.11,26.54 v18.03,26.54
DRAM_D6  (via drill 0.25)
  Top 0.152: U7.60 24.34,17.82 19.81,22.35 19.81,27.05 v17.91,28.96
  Bottom 0.152: v17.91,28.96 17.4,28.96 16.64,28.96 16.13,28.96 U10.50
DRAM_D7  (via drill 0.25)
  Top 0.152: U7.63 25.84,17.09 20.45,22.48 20.45,27.56 v17.91,30.1
  Bottom 0.152: U10.53 16.69,31.32 v17.91,30.1
DRAM_DQM  (via drill 0.25)
  Top 0.152: v13.08,28.7 13.08,28.96 14.35,30.23 14.35,31.44 U7.141
  Bottom 0.152: U10.39 13.92,20.12 13.08,20.95 v13.08,28.7
DRAM_RAS  (via drill 0.25)
  Top 0.152: v18.67,11.3 18.8,11.18 18.8,9.99 U7.49
  Bottom 0.152: U10.18 24.99,18.52 23.88,17.4 20.19,17.4 19.43,16.64 19.43,12.06 v18.67,11.3
DRAM_WE  (via drill 0.25)
  Top 0.152: v17.27,17.78 17.02,18.03 13.21,18.03 12.12,16.95 U7.26
  Bottom 0.152: U10.16 23.29,20.12 21.72,18.54 18.03,18.54 v17.27,17.78
FS_DN
  Top 0.305: U7.103 33.76,26.95 36.58,24.13 36.7,24 36.7,9.91 33.01,6.21 X1.D-
FS_DP
  Top 0.305: U7.104 34.27,27.45 37.08,24.64 37.34,24.38 37.34,9.53 33.66,5.84 X1.D+
GND  (via drill 0.25, 0.33, 0.51, 0.6)
  Top 0.152: U9.E4 21.99,44.3 21.57,44.73 v21.57,45.11
  Top 0.203: C18.2 21.73,50.53 v21.72,50.55 | C16.2 24.14,50.53 v24.13,50.55 | U9.A3 21.19,48.11 21.72,48.64 21.72,49.52 | U9.G2 19.85,42.15 C20.2 | U9.B2 U9.A2 | C17.2 v25.91,49.78 | U9.E6 23.84,44.28 25.41,45.86 C15.2 v25.91,46.61 | C2.2 35.45,17 v35.56,16.89 | RN2.3 37.95,28.21 v37.85,28.32 | RN2.1 39.55,28.14 v39.37,28.32
  Top 0.254: U7.120 24.84,32.33 25.29,32.78 C9.2 25.29,34.18 v25.4,34.29 | U7.51 19.84,8.92 19.42,8.49 C28.1 19.42,7 v19.43,6.99 | v13.08,6.99 12.94,7.13 C29.2 12.94,8.62 13.34,9.02 U7.38 | U9.A2 20.39,47.68 20.19,47.88 v20.19,48.39 | v19.3,48.39 19.3,48.13 19.59,47.85 U9.A1 | 21.72,49.52 C18.2 | U9.A4 21.99,47.77 22.23,48.01 v22.23,48.39 | U7.48 18.34,8.69 v18.16,8.51 | R12.1 27.94,2.03 v28.19,1.78 | U7.94 33.56,22.45 33.92,22.08 C7.2 v34.67,21.21 | U7.130 19.84,32.29 20.34,32.78 C14.2 20.34,34.27 v20.32,34.29 | U7.107 33.27,28.95 34.3,29.99 C33.2 35.67,29.99 v35.69,29.97 | C6.2 35.42,32.53 v35.69,32.26 | U7.83 34.49,16.95 C2.2 | C20.2 16.65,42.15 v16.38,42.42 | U7.16 9.67,21.95 9.26,22.37 C37.2 7.76,22.37 v7.75,22.35 | U7.31 9.75,14.45 9.4,14.1 8.78,14.1 C35.2 7.76,14.08 v7.75,14.1
  Top 0.305: 25.27,33.26 C9.2 | C34.2 27.93,7 v27.94,6.99 | U7.61 24.84,8.96 24.51,8.64 24.51,8.02 | C5.2 v7.24,10.29 | C4.2 v8.76,10.29 | C19.2 v17.53,44.58 | C8.2 31.77,7 v31.75,6.99 | 24.51,8.02 v24.51,6.99 | 24.51,8.02 C1.2 | X1.GND 34.95,5.75 v35.81,6.6 | Y1.4 6.68,18.11 6.86,18.29 8.31,18.29 Y1.2
  Top 0.406: C43.2 v23.75,2.03 | U1.3 28.38,4.77 v28.57,4.57 | U1.5 21.59,6.22 v21.72,6.35 | v23.75,38.48 C23.2 23.89,39.5 24.26,39.5 24.64,39.88 U8.2 | C13.2 10.4,33.42 9.65,34.16 C21.C 7.49,34.17 v7.24,34.42 | C24.2 26.4,43.29 v26.67,43.56 | U2.G$4 40.72,47.07 v40.89,47.24 | U2.G$3 39.52,47.02 v39.75,47.24 | U2.G$1 39.07,36.53 v39.37,36.83 | U2.G$2 41.62,36.54 v41.91,36.83 | C10.2 33.89,39.74 33.4,39.24 33.4,38.48 33.02,38.1 C3.C 30.6,38.1 v30.35,37.85 | U2.P$6 38.91,38.91 v39.24,39.24
  Top 0.61: C38.C 4.95,2.29 v4.7,2.54 | C11.C 17.65,2.29 16.76,3.17 U4.2 U4.1
  Bottom 0.305: U10.12 27.99,23.32 28.19,23.11 28.21,23.13 C27.2 28.83,24.26 v28.57,24.51 | U10.6 27.76,28.12 28.43,27.45 C32.2 v28.83,28.32 C36.2 | U10.28 17.16,11.32 v17.27,11.43 | U10.52 15.28,30.52 v14.99,30.23 | U10.54 16.09,32.55 15.88,32.77 v15.88,32.89 | C26.2 28.08,35.07 v28.19,35.18
  Bottom 0.406: U10.41 15.11,21.72 14.99,21.84 14.37,21.84 C31.2 14.35,20.95 v14.22,20.83 | v30.86,14.73 C12.C 30.1,13.46 29.23,12.59 C25.2 | C30.2 14.91,25.72 U10.46 16.95,25.72 v17.4,25.27 | J3.1 40.64,2.67 JP2.10 | Q1.2 7.43,39.43 v7.24,39.62
  Bottom 0.61: J4.1 38.23,12.95 v38.48,13.21
  other vias: 37.97,52.2 37.34,50.67 37.97,49.15 39.5,48.51 41.02,49.15 41.66,50.67 41.02,52.2 39.5,52.83 3.68,52.83 5.84,50.67 3.68,48.51 1.52,50.67 2.16,52.2 5.21,52.2 5.21,49.15 2.16,49.15 39.5,33.78 41.66,31.62 37.34,31.62 37.97,33.15 41.02,33.15 41.02,30.1 3.68,33.78 3.68,29.46 5.21,30.1 2.16,30.1 1.52,31.62 5.84,31.62 5.21,33.15 2.16,33.15 11.56,46.86 11.56,43.31 9.78,45.09 13.34,45.09 12.83,46.35 10.41,46.35 10.41,43.81 12.83,43.81 31.62,46.86 29.84,45.09 33.4,45.09 31.62,43.31 30.35,43.81 33.02,43.94 32.77,46.35 30.35,46.35 0.51,54.1 0.51,52.58 0.51,51.31 0.51,50.04 0.51,48.77 0.51,47.5 0.51,46.23 0.51,43.69 0.51,44.96 0.51,42.42 0.51,41.15 0.51,39.88 0.51,38.61 0.51,37.34 0.51,36.07 0.51,33.53 0.51,32.26 0.51,30.99 0.51,29.72 0.51,28.45 0.51,27.18 0.51,25.91 0.51,24.64 0.51,23.37 0.51,22.1 0.51,20.83 0.51,19.56 0.51,18.29 0.51,17.02 0.51,15.75 0.51,14.48 0.51,13.21 0.51,11.94 0.51,10.67 0.51,9.4 0.51,8.13 0.51,6.86 0.51,5.59 0.51,4.32 0.51,3.05 0.51,1.78 0.51,0.51 1.4,0.51 2.67,0.51 3.94,0.51 5.21,0.51 6.48,0.51 7.75,0.51 9.02,0.51 10.29,0.51 11.56,0.51 12.83,0.51 14.1,0.51 15.37,0.51 16.64,0.51 17.91,0.51 19.18,0.51 20.45,0.51 21.72,0.51 22.99,0.51 24.26,0.51 25.53,0.51 26.8,0.51 28.07,0.51 29.34,0.51 30.61,0.51 31.88,0.51 33.15,0.51 34.42,0.51 35.69,0.51 36.96,0.51 38.23,0.51 39.5,0.51 40.77,0.51 42.67,0.51 42.67,54.1 41.78,54.1 40.77,54.1 39.5,54.1 38.23,54.1 36.96,54.1 35.69,54.1 34.42,54.1 33.15,54.1 31.88,54.1 30.61,54.1 29.34,54.1 28.07,54.1 26.8,54.1 25.53,54.1 24.26,54.1 22.99,54.1 21.72,54.1 20.45,54.1 19.18,54.1 17.91,54.1 16.64,54.1 15.37,54.1 14.1,54.1 12.83,54.1 11.56,54.1 10.29,54.1 9.02,54.1 7.75,54.1 6.48,54.1 5.21,54.1 3.94,54.1 2.67,54.1 1.4,54.1 39.5,29.46 37.97,30.1 0.51,34.8 14.1,39.88 14.1,50.55 14.1,49.78 14.1,49.02 14.1,48.26 14.1,47.5 14.1,46.74 14.1,45.97 14.1,45.21 14.1,44.45 14.1,43.69 14.1,42.93 14.1,42.16 14.1,41.4 14.1,40.64 14.1,39.12 29.08,40.64 29.08,41.4 29.08,42.16 29.08,42.93 29.08,43.69 29.08,44.45 29.08,45.97 29.08,46.74 29.08,47.5 29.08,48.26 29.08,49.02 29.08,49.78 29.08,52.58 14.1,52.58 29.08,50.55 29.08,45.21 29.08,39.88 29.08,39.12 14.1,38.35 14.1,37.59 29.08,38.35 29.08,37.59 14.86,37.59 28.32,37.59 14.73,52.58 15.37,52.58 16.13,52.58 16.89,52.58 17.65,52.58 18.41,52.58 19.18,52.58 19.94,52.58 20.7,52.58 21.46,52.58 22.23,52.58 22.99,52.58 23.75,52.58 24.51,52.58 25.27,52.58 26.04,52.58 26.8,52.58 27.56,52.58 28.32,52.58 14.1,51.82 14.1,51.18 29.08,51.31 29.08,51.94 4.06,18.03 12.83,3.81 41.78,0.51 42.67,52.58 42.67,51.31 42.67,50.04 42.67,48.77 42.67,47.5 42.67,46.23 42.67,43.69 42.67,44.96 42.67,42.42 42.67,41.15 42.67,39.88 42.67,38.61 42.67,37.34 42.67,36.07 42.67,33.53 42.67,32.26 42.67,30.99 42.67,29.72 42.67,28.45 42.67,27.18 42.67,25.91 42.67,24.64 42.67,23.37 42.67,22.1 42.67,20.83 42.67,19.56 42.67,18.29 42.67,17.02 42.67,15.75 42.67,14.48 42.67,13.21 42.67,11.94 42.67,10.67 42.67,9.4 42.67,8.13 42.67,6.86 42.67,5.59 42.67,4.32 42.67,3.05 42.67,1.78 42.67,34.8
  pour GND (isolate 0.254): 0,0 0,54.61 43.43,54.61 43.43,0
  pour Top: 0,54.61 43.18,54.61 43.18,0 0,0 0,53.72 0.64,53.72 0.64,0.76 42.55,0.76 42.55,53.85 0,53.85
  pour Bottom: 0,54.61 43.18,54.61 43.18,0 0,0 0,53.72 0.64,53.72 0.64,0.76 42.55,0.76 42.55,53.85 0,53.85
  pour Top (isolate 0.305): 13.72,52.96 13.72,37.21 15.24,37.21 15.24,37.97 14.35,37.97 14.35,52.2 28.83,52.2 28.83,37.97 27.94,37.97 27.94,37.21 29.46,37.21 29.46,52.96
  pour Top (isolate 0.305): 3.81,21.59 6.99,21.59 6.99,14.35 3.81,14.35
  pour Bottom (isolate 0.305): 13.72,52.96 13.72,37.21 15.24,37.21 15.24,37.97 14.35,37.97 14.35,52.2 28.83,52.2 28.83,37.97 27.94,37.97 27.94,37.21 29.46,37.21 29.46,52.96
  pour Top: 10.92,6.22 14.73,6.22 14.73,1.4 10.92,1.4
LED_B
  Top 0.203: U7.135 17.34,34.09 16.13,35.31 12.32,35.31 10.79,36.83 10.54,37.08 7.37,37.08 6.86,37.59 4.83,39.62 4.72,39.73 RN4.7
LED_G
  Top 0.203: U7.136 16.84,33.71 15.75,34.8 11.94,34.8 10.29,36.45 6.86,36.45 6.35,36.96 4.19,39.12 3.92,39.39 RN4.6
LED_IR  (via drill 0.25)
  Top 0.203: U7.133 18.34,34.75 16.64,36.45 13.08,36.45 12.32,37.21 12.32,39.24 v11.81,39.75
  Bottom 0.203: 10.81,39.75 R5.1 10.81,39.75 | v11.81,39.75 10.81,39.75
LED_R
  Top 0.203: U7.134 17.84,34.48 16.51,35.81 12.7,35.81 11.3,37.21 10.79,37.72 7.75,37.72 7.24,38.23 5.59,39.88 5.52,39.95 RN4.8
N$1
  Top 0.127: U9.C5 23.18,46.28 23.18,46.93 23.34,47.09 24.61,47.09 25.15,47.62 25.89,47.62 C17.1
N$2
  Top 0.203: U7.23 10,18.45 9.65,18.8 8.38,20.07 7.69,20.07 Y1.3 7.29,20.05 C40.2
N$3
  Top 0.203: U9.A5 22.79,49.48
  Top 0.254: 22.79,49.48 C16.1
N$4
  Top 0.203: U7.24 9.44,17.95 8.51,17.02 8,16.51 7.33,16.51 Y1.1 6.93,16.56 C41.2
N$5
  Bottom 0.203: R5.2 9.36,38.47 Q1.1
N$6
  Top 0.127: U9.F2 20.39,43.5 20.78,43.89 23.18,43.89 U9.F6
  Top 0.203: C15.1 25.26,44.56 24.26,43.56 24.18,43.48 U9.F6
N$7
  Top 0.254: U7.33 9.89,13.45 9.65,13.21 9.65,12.83 9.4,12.57 9.29,12.46 C4.1
  Top 0.305: U7.32 U7.33 | C4.1 C5.1 U3.1
N$8
  Top 0.203: RN4.1 5.52,43.11 5.84,43.43 5.84,44.11 LED1.R
N$9
  Top 0.203: RN4.3 3.92,43.71 3.56,44.07 3.49,44.13 LED1.G
N$10
  Bottom 0.406: R4.1 7.1,45.83 10.41,49.15 LED3.K
N$11
  Top 0.203: RN4.2 4.72,44.56 3.81,45.47 3.75,45.53 LED1.B
N$13
  Top 0.127: C18.1 20.43,48.91 20.8,48.54 20.8,47.14 20.8,47.07 U9.B3
  Top 0.152: U9.B5 U9.B4 U9.B3
  Top 0.406: U6.1 C18.1
N$14
  Bottom 0.406: Q1.3 8.38,42.02 R4.2
N$16
  Bottom 0.406: LED2.K 30.1,53.34 10.54,53.34 LED3.A
N$20
  Top 0.305: RN8.1 6.41,29.39 JP1.1
N$21
  Top 0.305: RN8.2 6.62,28.59 3.43,25.4 3.43,23.88 JP1.2
N$22
  Top 0.406: X1.VBUS 32.35,6.57 33.53,7.75 U5.1
N$23
  Top 0.305: RN8.3 6.97,27.79 5.33,26.16 4.45,25.27 4.45,23.5 3.43,22.48 3.43,21.46 3.3,21.34 2.03,20.07 JP1.3
N$24  (via drill 0.33)
  Top 0.305: RN8.4 7.18,26.99 5.46,25.27 5.46,23.75 v5.4,23.69
  Bottom 0.305: JP1.4 3.56,18.92 3.56,21.84 v5.4,23.69
N$26
  Top 0.254: R12.2 26.02,4.81 26.54,5.33 26.63,5.42 U1.4
NRST  (via drill 0.25)
  Top 0.203: U7.25 9.83,17.45 v9.4,17.02 | RN2.5 37.15,25.58 38.35,24.38 38.35,20.19 JP2.4
  Bottom 0.203: v9.4,17.02 10.29,16.13 10.29,14.99 10.29,13.84 14.22,9.91 26.8,9.91 28.7,9.91 29.84,8.76 31.62,8.76 32.38,9.53 32.38,18.67 33.91,20.19 38.35,20.19 JP2.4
SD_CD  (via drill 0.25, 0.33)
  Top 0.203: U2.G$5 41.77,45.08 41.53,44.83 38.99,44.83 38.61,45.21 v37.08,45.21 37.03,45.27 RN6.8 | v30.48,36.83 30.23,36.58 27.18,36.58 v26.04,35.43 | U7.124 22.84,34.14 v24.13,35.43
  Bottom 0.203: v37.08,45.21 36.58,45.21 35.43,44.07 35.43,41.78 v30.48,36.83 | v24.13,35.43 v26.04,35.43
SDIO_CLK
  Top 0.203: U7.113 28.34,33.29 30.1,35.05 31.37,35.05 36.33,40.01 U2.P$5
SDIO_CMD  (via drill 0.25, 0.33)
  Top 0.203: U7.116 26.84,32.94 29.72,35.81 30.86,35.81 v31.37,36.32 | v36.07,42.16 36.32,42.42 36.32,42.78 RN6.5 36.76,42.87 36.83,42.8 37.42,42.21 U2.P$3
  Bottom 0.203: v31.37,36.32 36.07,41.02 v36.07,42.16
SDIO_D0  (via drill 0.33)
  Top 0.203: U7.98 33.33,24.45 v33.66,24.13 | U2.P$7 37.43,37.81 37.08,37.47 37.08,36.7 v36.96,36.58 36.85,36.47 RN5.7
  Bottom 0.203: v33.66,24.13 33.02,24.77 33.02,32 36.96,35.94 v36.96,36.58
SDIO_D1  (via drill 0.25)
  Top 0.203: U7.99 33.46,24.95 v33.66,25.15 | RN5.5 36.77,34.87 v36.96,35.05 38.02,36.12 U2.P$8
  Bottom 0.203: v33.66,25.15 34.29,25.78 34.29,32 36.96,34.67 v36.96,35.05
SDIO_D2  (via drill 0.25, 0.33)
  Top 0.203: U7.111 29.34,32.64 30.35,33.66 32.38,33.66 v32.64,33.91 | RN6.7 36.94,44.47 v37.08,44.32 37.17,44.41 U2.P$1
  Bottom 0.203: v37.08,44.32 37.97,43.43 37.97,39.24 v32.64,33.91
SDIO_D3  (via drill 0.25, 0.33)
  Top 0.203: U7.112 28.84,32.9 30.23,34.29 31.88,34.29 v33.53,35.94 | RN6.6 36.85,43.67 v37.08,43.43 37.2,43.31 U2.P$2
  Bottom 0.203: v33.53,35.94 37.08,39.5 v37.08,43.43
SPI4_MISO
  Top 0.305: U7.4 9.41,27.95 9.27,27.81 9.25,27.79 RN8.6
SPI4_MOSI
  Top 0.305: U7.5 9.8,27.45 9.4,27.05 8.86,27.05 RN8.5
SPI4_NSS
  Top 0.305: U7.2 9.77,28.95 9.4,28.57 8.82,28.57 RN8.7
SPI4_SCK
  Top 0.305: U7.1 8.86,29.45 RN8.8
SWCLK  (via drill 0.33)
  Top 0.203: v32,30.86 31.41,31.45 U7.109 | RN2.8 39.55,25.85 39.75,25.65 40.51,25.65 JP2.1
  Bottom 0.203: v32,30.86 32.26,30.61 32.26,24.26 33.66,22.86 38.99,22.86 JP2.1
SWDIO  (via drill 0.25)
  Top 0.203: RN2.7 38.75,25.76 v39.62,24.89 39.62,24 JP2.2 | U7.105 34.91,27.95 v35.94,26.92
  Bottom 0.203: v39.62,24.89 37.97,24.89 v35.94,26.92
TIM4_CH1  (via drill 0.25, 0.33)
  Top 0.203: U7.81 33.2,15.95 33.91,15.24 v34.54,15.24 | JP2.6 38.48,9.65 38.23,9.4 v38.23,6.6
  Bottom 0.203: v34.54,15.24 38.23,15.24 JP2.6 | v38.23,6.6 J3.3
TIM4_CH2  (via drill 0.25)
  Top 0.203: U7.82 33.59,16.45 34.04,16 v35.05,16
  Bottom 0.203: v35.05,16 36.32,16 36.96,16.64 J4.3 39.37,16.64 JP2.5
USART2_RX
  Top 0.203: U7.37 11.86,9.95 10.54,8.64 4.83,8.64 3.56,9.91 3.56,10.79 JP1.6
USART2_TX
  Top 0.203: U7.36 10.84,10.33 9.91,9.4 5.21,9.4 4.45,10.16 4.45,12.45 JP1.5
USART3_RX  (via drill 0.33)
  Top 0.203: v35.81,12.83 35.69,12.95 34.8,12.95 34.29,13.46 34.29,13.97 34.16,14.1 | 34.16,14.1 33.91,14.35 | U7.78 33.81,14.45 34.16,14.1
  Bottom 0.203: v35.81,12.83 36.58,12.06 36.58,11.05 37.34,10.29 40.64,10.29 JP2.7
USART3_TX  (via drill 0.33)
  Top 0.203: v35.81,11.56 35.31,12.06 34.54,12.06 33.66,12.95 33.66,13.59 33.4,13.84 33.29,13.95 U7.77
  Bottom 0.203: v35.81,11.56 35.81,10.54 36.96,9.4 38.99,9.4 JP2.8
VBAT  (via drill 0.51)
  Top 0.406: U1.6 22.92,4.77 v22.99,4.7
  Bottom 0.406: J3.2 40.64,5.21 JP2.9 | J3.2 33.78,5.21 31.88,3.3 31.75,3.17 24.51,3.17 v22.99,4.7 | J3.2 J4.2
VBUS  (via drill 0.33, 0.51)
  Top 0.254: U7.101 33.87,25.95 36.07,23.75 36.07,20.83 v34.54,19.3
  Top 0.406: C43.1 21.59,2.04 U1.8 21.63,3.43 23.11,3.43 23.75,3.43 24.77,4.45 v24.77,5.46 | U5.2 v33.53,10.92
  Bottom 0.254: v33.53,10.92 33.27,11.18 33.27,18.03 v34.54,19.3
  Bottom 0.406: v33.53,10.92 33.53,7.37 32.13,5.97 25.27,5.97 v24.77,5.46
VCAP1
  Top 0.305: U7.71 29.84,9.01 29.34,8.51 29.23,8.4 C34.1
VCAP2  (via drill 0.33)
  Top 0.254: U7.106 33.66,28.45 33.91,28.7 34.66,28.7 | 34.66,28.7 C33.1 34.66,28.7 | 34.66,28.7 v35.69,28.7
VCC  (via drill 0.25, 0.33, 0.6)
  Top 0.203: C2.1 35.42,18.3 v35.56,18.16 | RN7.4 16.15,39.39 v16,39.24 | RN7.3 15.35,39.35 v15.24,39.24 | RN2.2 38.75,28.18 v38.61,28.32 | RN2.4 37.15,28.12 v36.96,28.32
  Top 0.254: U7.121 24.34,32.43 24,32.77 24,33.26 | U7.52 20.34,8.87 20.72,8.49 C28.2 20.72,7 v20.7,6.99 | U7.39 13.84,9.02 14.22,8.64 14.22,8.02 | C29.1 14.24,7.13 v14.1,6.99 | U7.131 19.34,32.48 19.04,32.78 C14.1 19.04,34.27 v19.05,34.29 | U7.95 33.49,22.95 33.92,23.38 C7.1 v34.67,24.26 | U7.6 10.06,26.95 v9.4,26.29 | v35.69,30.99 35.45,31.23 C6.1 33.64,31.23 | U7.84 33.2,17.45 34.05,18.3 C2.1 | U7.108 32.34,29.93 33.64,31.23 | 33.64,31.23 33.66,31.24 | C9.1 23.99,34.15 v24.13,34.29 | v7.75,21.08 7.76,21.07 C37.1 8.78,21.08 9.27,21.08 9.64,21.45 U7.17 | U7.30 9.81,14.95 9.4,15.37 8.78,15.37 C35.1 7.76,15.38 v7.75,15.37
  Top 0.305: 24,33.26 C9.1 | U7.62 25.34,9.08 25.78,8.64 25.78,8.02 | 14.22,8.02 C29.1 | v30.48,6.99 30.46,7 C8.1 30.48,8.02 30.48,8.76 30.34,8.9 U7.72 | U3.2 v5.84,10.29 | 25.78,8.02 v25.78,6.99 | 25.78,8.02 C1.1 | U7.143 U7.144
  Top 0.356: v34.04,42.67 34.23,42.87 RN6.4 RN6.3 RN6.2 RN6.1 | RN5.4 34.76,34.5 34.42,34.16 v34.04,34.16
  Top 0.406: RN5.4 RN5.3 RN5.2 RN5.1 | LED1.A 5.82,46.63 v5.59,46.86 | C23.1 23.76,40.64 24.26,40.64 24.45,40.83 U8.1 26.54,40.83 v26.54,39.88 26.54,38.93 U8.3 | U7.144 12.49,31.45 11.81,32.13 11.19,32.13 C13.1 10.53,32.12 9.78,31.37 C21.A 7.5,31.37 v7.24,31.62 | U2.P$4 34.49,41.11 C10.1 32.27,41.04 C3.A 30.61,40.9 v30.35,40.64
  Top 0.61: U4.6 U4.5 6.99,5.71 | 6.99,5.71 C38.A | 6.99,5.71 6.99,6.98 v6.86,7.11
  Bottom 0.305: U10.14 28.07,21.72 28.19,21.84 28.81,21.84 | v29.08,25.27 28.83,25.53 C32.1 28.81,26.16 28.32,26.16 27.88,25.72 U10.9 | C36.1 28.81,30.52 U10.3 26.45,30.52 v25.78,29.84 | 28.81,21.84 28.81,20.84 v28.83,20.83 | 28.81,21.84 C27.1 | R1.1 v28.83,20.07 | U10.1 27.09,32.85 26.78,33.16 C26.1 26.78,35.04 v26.92,35.18
  Bottom 0.406: v17.53,23.37 17.48,23.32 U10.43 15.19,23.32 14.99,23.11 14.37,23.11 C31.1 | v31.11,9.4 30.86,9.65 C12.A 29.97,10.67 29.35,11.29 C25.1 28.67,11.32 U10.27 | U10.49 14.39,28.12 C30.1 v14.35,29.08
  pour VCC (isolate 0.254): 0,0 0,54.61 43.43,54.61 43.43,0
VIN
  Top 0.406: U1.7 19.5,4.12 19.05,4.57 18.8,4.83 C11.A
  Top 0.61: U4.3 U4.4 18.67,5.71 C11.A

## Text on the board
tPlace: penMV | SCK | SWC | SEL | SWD | SDI | BOOT | SDO | RST | TXD | PWM2 | RXD | PWM1 | ADC1 | RXD | ADC2 | TXD | VIN | 3.3v | GND | GND
bPlace: OpenMV2 R1